# EAGLE board Syn-ShieldCarger-v02 (EAGLE 5.10)
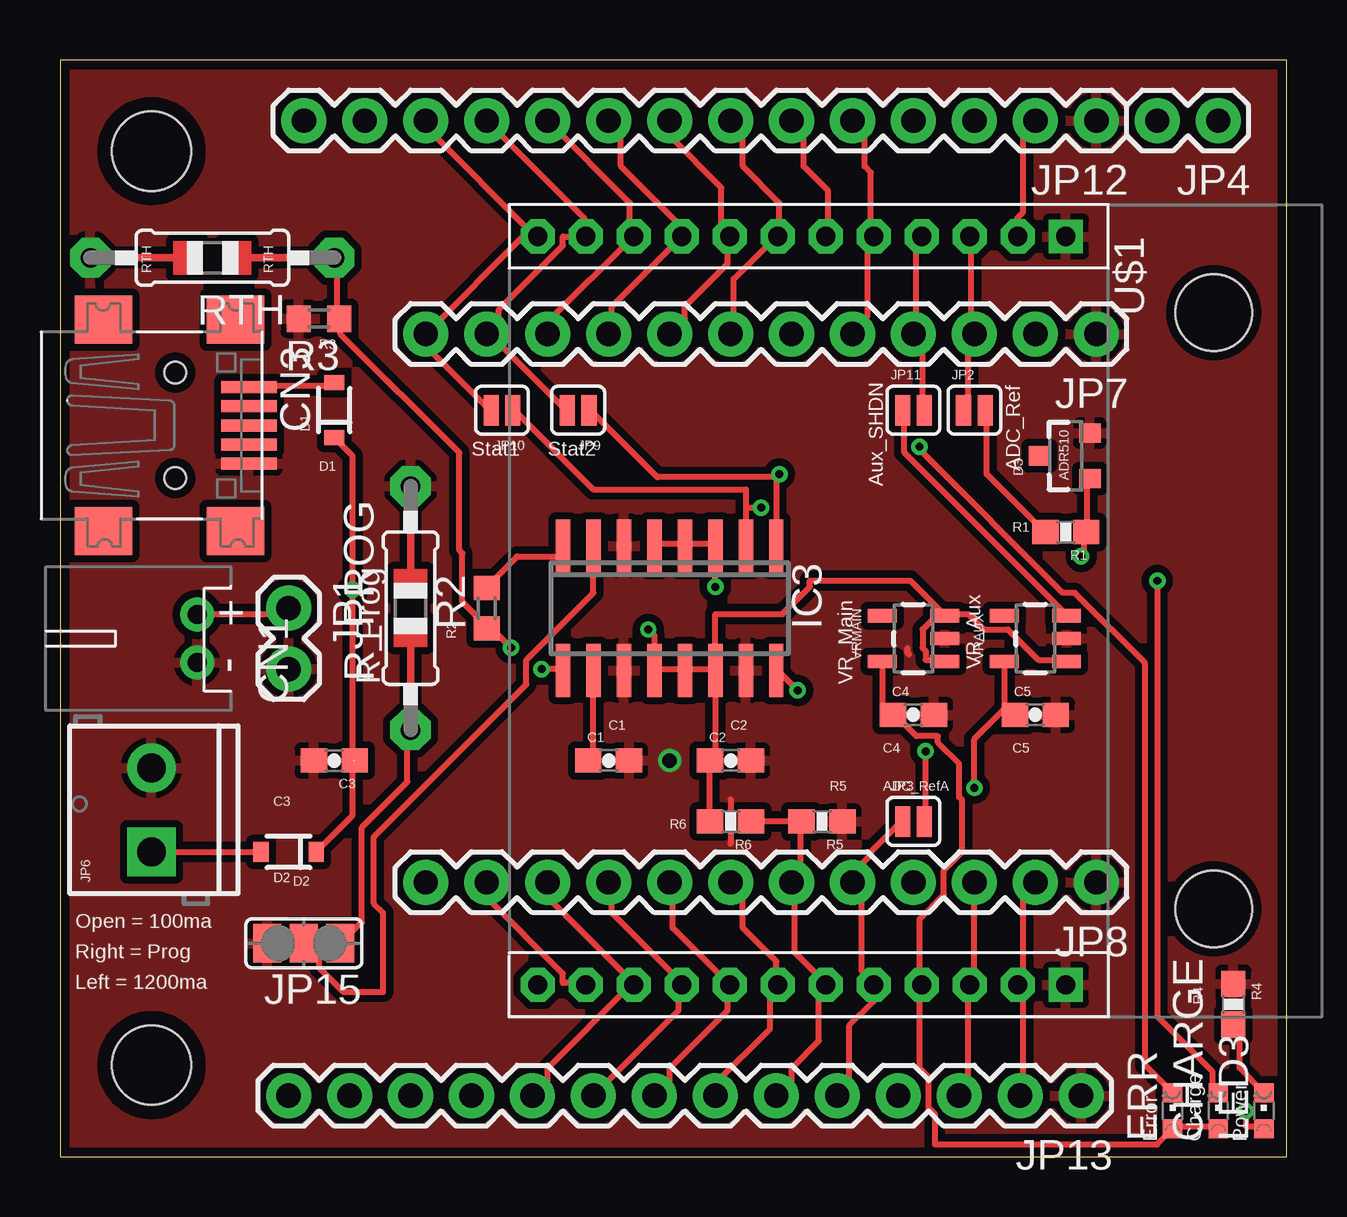
[diagram p0: board, top side]
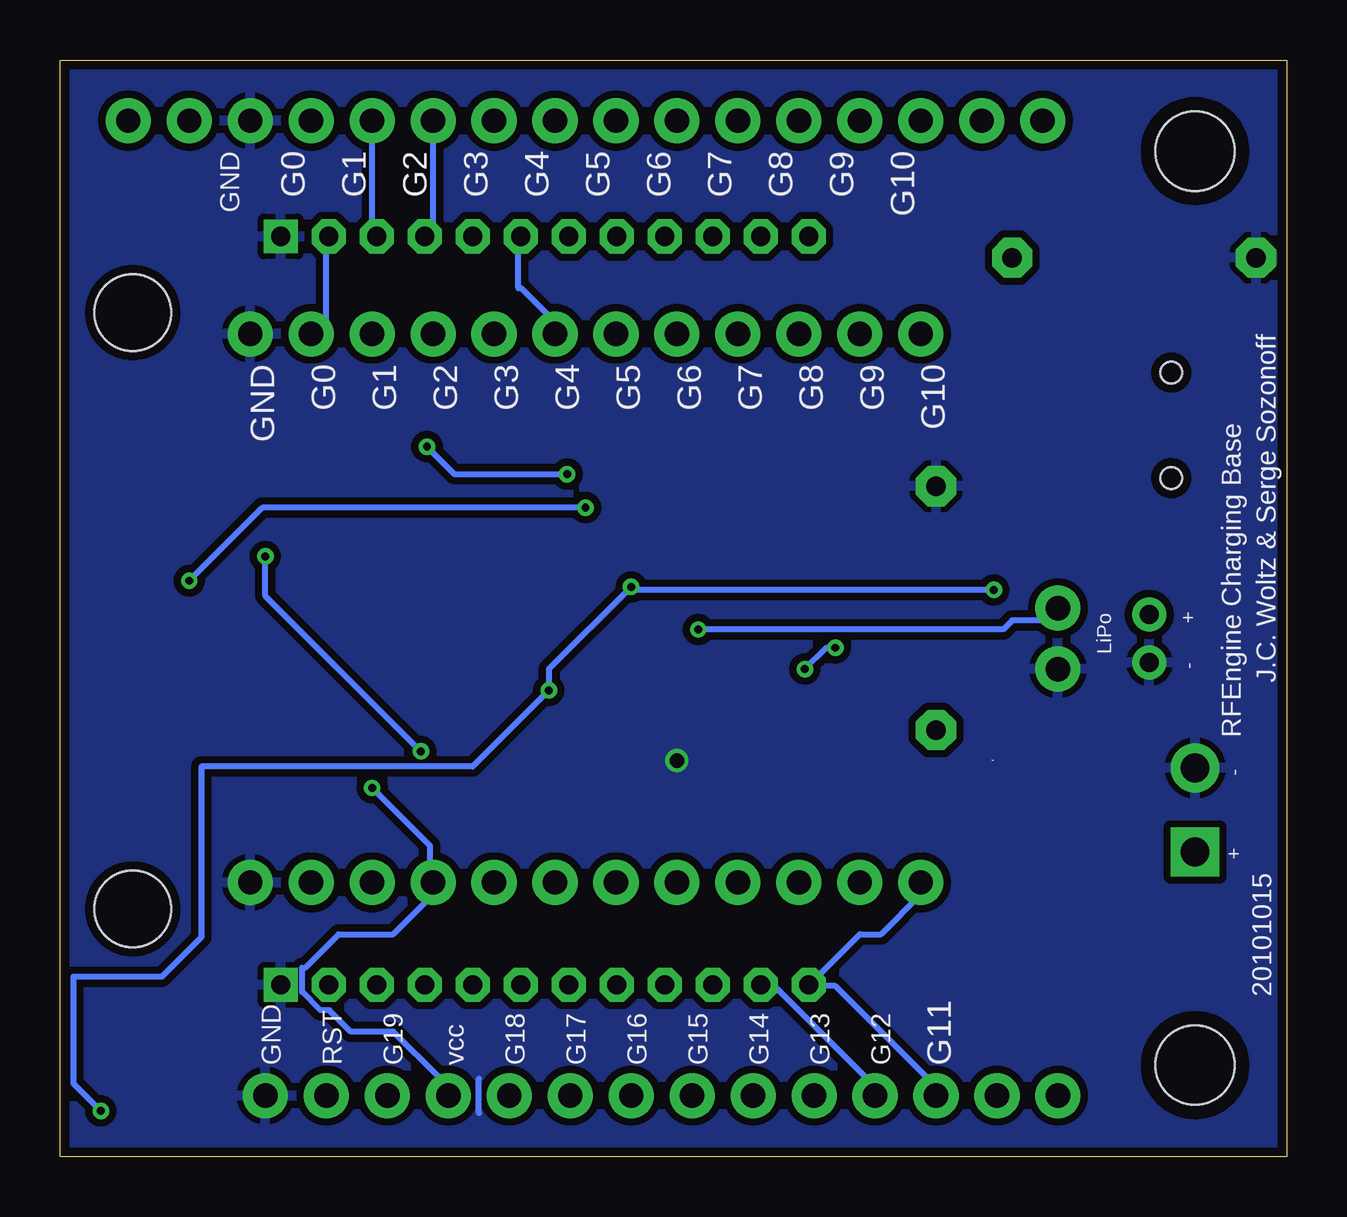
[diagram p1: board, bottom side, seen from below]

Size 51.1 x 45.71 mm. Coordinates in mm from the lower left corner, seen from the top.
Outline: 0,0 51.1,0 51.1,45.71 0,45.71 0,0
Copper layers (1*16): Top 0.0356mm / dielectric 1.5011mm / Bottom 0.0356mm
Design rules "LaenPCBOrder-JCModified": minimum track width 10mil, minimum drill 13mil, track to track 10mil, track to pad 6mil, pad to pad 6mil, via to via 6mil, smd to smd 6mil, copper to edge 15mil, drill to drill 6mil, minimum pad ring 12mil, minimum via ring 7mil, stop-mask expansion 4mil, vias tented up to drill 25mil, thermal gap 10mil

## Footprints (pad centres in the part's own frame; a part is rotated, then mirrored left to right if it is on the bottom)
0603-CAP = smd 1.1 x 1: 1 -0.85,0; 2 0.85,0
CHIPLED_0603 = smd 0.8 x 0.8: A 0,-0.75; C 0,0.75
JST-PH-2-THM-RA = drill 0.8 pad 1.422 round: 1 1,0; 2 -1,0
USB-MINIB = smd 0.5 x 2.308: D+ 0,4.064; D- -0.8,4.064; GND 1.6,4.064; ID 0.8,4.064; VBUS -1.6,4.064 | smd 2 x 2.4: GND1 -4.4,-2; GND2 -4.4,3.5; GND3 4.4,3.5; GND4 4.4,-2 | hole 0.9: -2.2,1; 2.2,1
SOD-323 = smd 0.63 x 0.83: 1 -1.15,0; 2 1.15,0
SOT23-3 = smd 0.8 x 0.9: 1 -0.95,-1; 2 0.95,-1; 3 0,1.1
SO16 = smd 0.6 x 2.2: 1 -4.445,-2.6; 2 -3.175,-2.6; 3 -1.905,-2.6; 4 -0.635,-2.6; 5 0.635,-2.6; 6 1.905,-2.6; 7 3.175,-2.6; 8 4.445,-2.6; 9 4.445,2.6; 10 3.175,2.6; 11 1.905,2.6; 12 0.635,2.6; 13 -0.635,2.6; 14 -1.905,2.6; 15 -3.175,2.6; 16 -4.445,2.6
1X02 = drill 1.016 pad 1.88 round: 1 0,0; 2 2.54,0
SJ_2S = smd 0.635 x 1.27: 1 -0.45,0; 2 0.45,0
STAND-OFF = hole 3.302: 0,0
SCREWTERMINAL-3.5MM-2 = drill 1.2 pad 2.032 square: 1 0,0 | drill 1.2 pad 2.032 round: 2 3.5,0
1X12 = drill 1.016 pad 1.88 round: 1 0,0; 2 2.54,0; 3 5.08,0; 4 7.62,0; 5 10.16,0; 6 12.7,0; 7 15.24,0; 8 17.78,0; 9 20.32,0; 10 22.86,0; 11 25.4,0; 12 27.94,0
1X14 = drill 1.016 pad 1.88 round: 1 0,0; 2 2.54,0; 3 5.08,0; 4 7.62,0; 5 10.16,0; 6 12.7,0; 7 15.24,0; 8 17.78,0; 9 20.32,0; 10 22.86,0; 11 25.4,0; 12 27.94,0; 13 30.48,0; 14 33.02,0
SJ_2 = smd 1.168 x 1.6: 1 -1.524,0; 2 0,0; 3 1.524,0
0603-RES = smd 1.1 x 1: 1 -0.85,0; 2 0.85,0
R0603 = smd 1 x 1.1: 1 -0.85,0; 2 0.85,0
0805-THM = drill 0.813 pad 1.676 octagon: 1 -5.08,0; 2 5.08,0
SYNAPSERFENGINE = drill 0.8 square: 1 0,0; 24 31.2,0 | drill 0.8 pad 1.422 octagon: 2 0,-2; 3 0,-4; 4 0,-6; 5 0,-8; 6 0,-10; 7 0,-12; 8 0,-14; 9 0,-16; 10 0,-18; 11 0,-20; 12 0,-22; 13 31.2,-22; 14 31.2,-20; 15 31.2,-18; 16 31.2,-16; 17 31.2,-14; 18 31.2,-12; 19 31.2,-10; 20 31.2,-8; 21 31.2,-6; 22 31.2,-4; 23 31.2,-2 | hole 3.2: 3.17,6.16; 28.03,6.16
SOT23-5 = smd 0.55 x 1.2: 1 -0.95,-1.3; 2 0,-1.3; 3 0.95,-1.3; 4 0.95,1.3; 5 -0.95,1.3

## Placement (x,y rotation side)
C1  0.47uF  [0603-CAP]  22.86,16.51 0 top
C2  10uF  [0603-CAP]  27.94,16.51 0 top
C3  10uF  [0603-CAP]  11.43,16.51 180 top
C4  1uF  [0603-CAP]  35.56,18.41 0 top
C5  1uF  [0603-CAP]  40.64,18.41 0 top
CHARGE  ORG  [CHIPLED_0603]  48.26,1.91 0 top
CN1  [JST-PH-2-THM-RA]  5.71,21.59 90 top
CN3  [USB-MINIB]  3.81,30.48 270 top
D1  [SOD-323]  11.43,31.11 90 top
D2  [SOD-323]  9.53,12.7 180 top
D3  ADR510  [SOT23-3]  41.91,29.21 90 top
ERR  RED  [CHIPLED_0603]  46.35,1.91 0 top
IC3  [SO16]  25.4,22.86 180 top
JP1  [1X02]  9.53,22.86 270 top
JP2  [SJ_2S]  38.1,31.11 0 top
JP3  [SJ_2S]  35.56,13.97 0 top
JP4  [1X02]  48.26,43.18 180 top
JP5  STAND-OFF  [STAND-OFF]  3.81,41.91 0 top
JP6  [SCREWTERMINAL-3.5MM-2]  3.81,12.7 90 top
JP7  M12PTH  [1X12]  43.18,34.29 180 top
JP8  M12PTH  [1X12]  43.18,11.43 180 top
JP9  [SJ_2S]  21.59,31.11 180 top
JP10  [SJ_2S]  18.41,31.11 180 top
JP11  [SJ_2S]  35.56,31.11 0 top
JP12  M14  [1X14]  43.18,43.18 180 top
JP13  M14  [1X14]  42.55,2.54 180 top
JP15  [SJ_2]  10.16,8.89 180 top
JP17  STAND-OFF  [STAND-OFF]  3.81,3.81 0 top
LED3  [CHIPLED_0603]  50.16,1.91 0 top
R1  10K  [0603-RES]  41.91,26.04 180 top
R2  6.19K  [R0603]  17.78,22.86 90 top
R3  7.3K  [R0603]  10.79,34.92 180 top
R4  1K  [0603-RES]  48.9,6.35 270 top
R5  1M  [0603-RES]  31.75,13.97 180 top
R6  1M  [0603-RES]  27.94,13.97 180 top
R_PROG  [0805-THM]  14.61,22.86 90 top
RTH  10K @ 25degC  [0805-THM]  6.35,37.47 180 top
U$1  SYNAPSEWIRELESS-RFENGINESTD  [SYNAPSERFENGINE]  41.91,38.35 270 top
VRAUX  MCP1802  [SOT23-5]  40.64,21.59 90 top
VRMAIN  MCP1802  [SOT23-5]  35.56,21.59 90 top

## Library data of the parts
C1-C5 D1 D2 JP1-JP13 JP15 JP17 R1 R4-R6 = SparkFun
CHARGE CN1 CN3 ERR IC3 LED3 R2 R3 R_PROG RTH = adafruit
D3 VRAUX VRMAIN = 0_jc-modified
U$1 = 0_jc-custom

## Nets
AUX_SHDN: JP11.1 VRAUX.3
GND: C1.2 C2.2 C3.2 C4.2 C5.2 CN1.2 CN3.GND D3.2 IC3.6 IC3.11 IC3.15 JP1.2 JP6.2 JP7.1 JP8.1 JP12.1 JP13.1 JP15.3 R3.2 R4.1 R5.1 R_PROG.2 RTH.2 U$1.1 U$1.24 VRAUX.2 VRMAIN.2
GP0: JP7.2 JP12.2 U$1.2
GP1: JP2.1 JP7.3 JP12.3 U$1.3
GP2: JP7.4 JP11.2 JP12.4 U$1.4
GP3: JP7.5 JP12.5 U$1.5
GP4: JP7.6 JP12.6 U$1.6
GP5: JP7.7 JP12.7 U$1.7
GP6: JP7.8 JP12.8 U$1.8
GP7: JP7.9 JP12.9 U$1.9
GP8: JP7.10 JP12.10 U$1.10
GP9: JP7.11 JP9.2 JP12.11 U$1.11
GP10: JP7.12 JP10.2 JP12.12 U$1.12
GP11: JP8.12 JP13.12 U$1.13
GP12: JP8.11 JP13.11 U$1.14
GP13: JP8.10 JP13.10 U$1.15
GP14: JP8.9 JP13.9 U$1.16
GP15: JP8.8 JP13.8 U$1.17
GP16: JP8.7 JP13.7 U$1.18
GP17: JP8.6 JP13.6 R5.2 R6.1 U$1.19
GP18: JP3.1 JP8.5 JP13.5 U$1.20
GP19: JP8.3 JP13.3 U$1.22
MPROG: IC3.7 JP15.2
N$1: JP4.2
N$2: LED3.C R4.2
N$3: D3.1 JP3.2 R1.1
N$4: JP2.2 R1.2
N$5: JP4.1
N$6: JP12.13
N$7: IC3.8 R2.2
N$8: IC3.9 R2.1 R3.1 RTH.1
N$9: C1.1 IC3.10
N$10: JP12.14
N$11: JP15.1 R_PROG.1
N$12: JP13.13
N$13: JP13.14
N$21: CN3.VBUS D1.2
RESET: JP8.2 JP13.2 U$1.23
STAT1: CHARGE.C IC3.2 JP10.1
STAT2: ERR.C IC3.1 JP9.1
VBAT+: C2.1 CN1.1 IC3.12 IC3.13 IC3.14 JP1.1 R6.2 VRAUX.1 VRMAIN.1 VRMAIN.3
VCC3: C4.1 CHARGE.A ERR.A U$1.21 VRMAIN.5
VCC3_AUX: C5.1 JP8.4 JP13.4 VRAUX.5
VIN: C3.1 D1.1 D2.1 IC3.3 IC3.4 IC3.5 IC3.16 LED3.A
VINJ: D2.2 JP6.1

## Tracks (layer width: path | path; a pad name or v marks a point on that pad's centre or on a via)
AUX_SHDN
  Top 0.254: VRAUX.3 41.91,22.61 35.18,29.34 35.18,31.11 JP11.1
GND  (via drill 0.6)
  Top 0.254: 35.31,21.19 35.31,21.08 35.37,20.93 | 27.94,14.89 27.94,13.05
  Bottom 0.254: 33.66,1.82 33.66,3.26
  other vias: 25.4,16.51
  pour Bottom (isolate 0.305): 0,45.72 50.8,45.72 50.8,0 0,0
  pour Top (isolate 0.305): 0,45.72 50.8,45.72 50.8,0 0,0
GP0
  Top 0.254: JP12.2 40.13,42.67 40.13,39.37 39.88,39.12 39.88,38.35 U$1.2
  Bottom 0.254: JP7.2 40.01,34.29 40.01,38.35 U$1.2
GP1
  Top 0.254: JP2.1 37.72,31.11 37.85,31.24 37.85,34.04 JP7.3 37.97,34.29 37.97,38.35 U$1.3
  Bottom 0.254: JP12.3 38.1,38.35 U$1.3
GP2
  Top 0.254: JP11.2 35.94,31.11 35.94,33.4 35.56,33.78 JP7.4 35.69,33.78 35.69,38.23 35.81,38.35 U$1.4
  Bottom 0.254: JP12.4 35.56,38.35 U$1.4
GP3
  Top 0.254: JP7.5 33.02,34.42 33.66,35.05 33.66,38.1 U$1.5 33.78,38.35 33.78,41.02 33.53,41.27 33.53,42.67 JP12.5
GP4
  Top 0.254: JP12.6 30.99,42.67 30.99,41.27 32,40.26 32,38.35 U$1.6
  Bottom 0.254: JP7.6 30.48,34.8 31.88,36.2 32,36.2 32,38.35 U$1.6
GP5
  Top 0.254: JP7.7 28.07,34.42 28.07,36.58 29.84,38.35 U$1.7 29.97,38.35 29.97,39.75 28.45,41.27 28.45,42.67 JP12.7
GP6
  Top 0.254: 27.81,38.35 27.56,38.61 27.56,40.39 25.4,42.55 JP12.8 | JP7.8 26.04,34.92 26.04,35.43 27.81,37.21 27.81,38.35 | 27.81,38.35 U$1.8
GP7
  Top 0.254: JP7.9 22.99,34.42 22.99,35.43 U$1.9 25.78,38.35 25.78,38.86 23.37,41.27 23.37,42.67 JP12.9
GP8
  Top 0.254: JP7.10 20.32,34.8 23.88,38.35 U$1.10 23.75,38.35 23.75,39.75 JP12.10
GP9
  Top 0.254: JP9.2 21.08,31.11 17.91,34.29 JP7.11 18.29,34.04 18.29,35.31 20.95,37.97 20.95,38.35 21.84,38.35 | JP12.11 21.84,39.12 21.84,38.35 | 21.84,38.35 U$1.11
GP10
  Top 0.254: JP10.2 17.91,31.11 15.24,33.78 JP7.12 19.43,38.48 19.43,38.61 U$1.12 19.81,38.35 15.24,42.93 JP12.12
GP11
  Bottom 0.254: JP8.12 15.24,10.92 16.89,9.27 17.78,9.27 19.81,7.24 U$1.13 19.81,7.11 18.8,7.11 14.99,3.3 14.61,3.3 JP13.12
GP12
  Top 0.254: JP8.11 17.78,10.79 20.95,7.62 20.95,7.24 21.84,7.24 U$1.14
  Bottom 0.254: JP13.11 17.14,3.3 17.53,3.3 21.34,7.11 21.84,7.11 U$1.14
GP13
  Top 0.254: JP8.10 20.32,10.79 23.88,7.24 U$1.15 23.75,7.24 23.75,7.11 20.32,3.68 20.32,3.17 JP13.10
GP14
  Top 0.254: JP8.9 22.99,11.3 22.99,10.16 25.91,7.24 U$1.16 25.78,7.24 25.78,6.1 JP13.9
GP15
  Top 0.254: JP8.8 25.53,11.3 25.53,9.53 27.81,7.24 U$1.17 27.81,7.11 27.81,6.1 25.4,3.68 25.4,3.17 JP13.8
GP16
  Top 0.254: JP13.7 27.3,3.05 29.59,5.33 29.59,6.86 29.84,7.11 U$1.18 29.84,7.24 29.84,8.13 28.45,9.53 28.45,10.92 JP8.7
GP17
  Top 0.254: 30.86,13.97 R6.1 | 30.86,13.97 30.86,12.32 30.48,11.94 JP8.6 30.61,11.94 30.61,8.51 31.88,7.24 U$1.19 31.62,7.37 31.62,4.83 30.48,3.68 30.48,3.17 JP13.6 | 30.86,13.97 R5.2
GP18
  Top 0.254: JP3.1 35.05,13.97 33.78,12.7 33.78,12.57 33.02,11.81 JP8.5 33.4,12.06 33.4,7.75 33.91,7.24 U$1.20 33.91,7.11 33.91,6.48 32.89,5.46 32.89,3.05 JP13.5
GP19
  Top 0.254: JP8.3 38.1,7.37 37.97,7.24 U$1.22 37.85,7.11 37.85,2.92 JP13.3
MPROG
  Top 0.254: JP15.2 10.79,8.26 10.79,7.87 11.81,6.86 13.46,6.86 13.46,10.16 13.08,10.54 13.08,13.34 19.43,19.68 19.43,20.7 22.23,23.5 IC3.7
N$2
  Top 0.254: LED3.C 49.15,3.68 49.15,4.95 48.9,5.21 R4.2
N$3  (via drill 0.33)
  Top 0.254: D3.1 42.8,28.19 42.8,26.04 R1.1 42.67,26.04 42.67,25.15 v42.55,25.02 | v36.07,16.89 36.07,13.97 JP3.2
  Bottom 0.254: v36.07,16.89 42.55,23.37 v42.55,25.02
N$4
  Top 0.254: R1.2 41.02,26.04 38.61,28.45 38.61,31.11 JP2.2
N$7
  Top 0.254: R2.2 17.78,23.75 19.05,25.02 20.95,25.02 IC3.8
N$8  (via drill 0.33)
  Top 0.254: v20.07,20.32 20.95,20.32 IC3.9 | v18.8,21.21 17.78,22.23 R2.1 17.78,22.1 16.76,23.11 16.76,25.15 16.64,25.27 16.64,29.34 11.68,34.29 11.68,34.92 R3.1 11.56,34.92 11.56,37.34 RTH.1
  Bottom 0.254: v20.07,20.32 19.18,21.21 v18.8,21.21
N$9
  Top 0.254: C1.1 22.1,16.51 22.23,16.64 IC3.10
N$11
  Top 0.254: JP15.1 12.57,9.78 12.57,13.72 14.48,15.62 14.48,17.65 R_PROG.1
N$21
  Top 0.254: D1.2 11.43,32.13 7.87,32.13 CN3.VBUS
RESET
  Top 0.254: JP13.2 40.13,2.67 40.13,6.99 40.01,7.11 U$1.23 40.13,7.11 40.13,10.92 JP8.2
STAT1  (via drill 0.33)
  Top 0.254: JP10.1 18.92,31.11 22.23,27.81 28.57,27.81 28.57,27.05 | 28.57,27.05 IC3.2 | v45.72,24 45.72,5.84 48.01,3.56 48.01,2.92 CHARGE.C | 28.57,27.05 v29.21,27.05
  Bottom 0.254: v45.72,24 42.67,27.05 v29.21,27.05
STAT2  (via drill 0.33)
  Top 0.254: 29.84,28.32 24.89,28.32 22.1,31.11 JP9.1 | 29.84,28.32 IC3.1 | v35.81,29.59 35.81,29.46 41.78,23.5 42.29,23.5 45.21,20.57 45.21,3.81 ERR.C | v29.97,28.45 29.84,28.32
  Bottom 0.254: v35.81,29.59 34.67,28.45 v29.97,28.45
VBAT+  (via drill 0.33)
  Top 0.254: JP1.1 9.53,22.61 5.71,22.61 CN1.1 | VRMAIN.1 36.83,20.7 36.07,20.7 36.07,21.08 35.94,21.21 35.94,21.97 36.45,22.48 36.83,22.48 VRMAIN.3 | VRAUX.1 41.91,20.7 40.77,20.7 39.5,21.97 38.48,21.97 37.85,22.61 36.96,22.61 VRMAIN.3 | 24.77,20.32 26.04,20.32 | R6.2 27.05,13.97 27.05,16.51 C2.1 27.18,16.51 27.3,16.64 IC3.14 27.3,20.32 | 26.04,20.32 27.3,20.32 | 26.04,20.32 IC3.13 | 27.3,20.32 27.3,22.61 30.1,22.61 31.24,23.75 31.24,24 35.43,24 36.83,22.61 VRMAIN.3 | v24.51,21.97 24.77,21.72 24.77,20.32 | 24.77,20.32 IC3.12
  Bottom 0.254: JP1.1 10.03,22.35 11.43,22.35 11.81,21.97 v24.51,21.97
VCC3
  Top 0.254: VRMAIN.5 34.29,20.57 34.29,18.8 34.67,18.41 C4.1 34.8,18.41 35.69,17.53 36.58,17.53 36.58,17.27 37.47,16.38 37.47,14.99 37.59,14.86 37.59,12.7 36.83,11.94 36.83,10.92 35.81,9.91 35.81,7.24 U$1.21 35.81,7.11 35.81,3.68 36.2,3.3 36.2,2.03 36.45,1.78 36.45,0.51 45.72,0.51 46.35,1.14 ERR.A 46.35,1.27 48.26,1.27 CHARGE.A
VCC3_AUX  (via drill 0.33)
  Top 0.254: VRAUX.5 39.37,20.57 39.37,18.8 39.75,18.41 C5.1 39.37,18.67 38.1,17.4 v38.1,15.37
  Bottom 0.254: v38.1,15.37 35.69,12.95 35.69,11.43 | JP13.4 34.92,3.3 35.31,3.3 37.21,5.21 38.99,5.21 39.88,6.1 40.26,6.1 41.02,6.86 41.02,7.87 40.89,7.87 39.5,9.27 37.21,9.27 35.69,10.79 35.69,11.43 | 35.69,11.43 JP8.4
VIN  (via drill 0.33)  (1 unrouted)
  Top 0.254: D2.1 10.67,12.7 12.19,14.22 12.19,16.51 v12.19,23.62 12.19,29.21 11.43,29.97 D1.1 | 26.04,25.53 24.77,25.53 IC3.5 | 26.04,25.53 27.3,25.53 IC3.3 v27.3,23.75 | 26.04,25.53 IC3.4 | v49.4,1.91 49.4,1.27 50.16,1.27 LED3.A | v30.73,19.43 29.84,20.32 IC3.16
  Bottom 0.254: v49.4,1.91 50.55,3.05 50.55,7.49 46.86,7.49 45.21,9.14 45.21,16.26 33.91,16.26 v30.73,19.43 30.73,20.32 v27.3,23.75 27.3,23.62 v12.19,23.62
VINJ
  Top 0.254: JP6.1 D2.2

## Text on the board
tPlace: RTH | RTH | R3 | D1 | Stat1 | Stat2 | ADC_Ref | Aux_SHDN | ADR510 | R1 | R2 | R_Prog | VR_Main | VR_Aux | C1 | C2 | C4 | C5 | C3 | R5 | ADC_RefA | R6 | D2 | Open = 100ma | Right = Prog | Left = 1200ma | R4 | Error | Charge | Power
bPlace: G10 | G9 | G8 | G7 | G6 | G5 | G4 | G3 | G2 | G1 | G0 | GND | J.C. Woltz & Serge Sozonoff | G10 | G9 | G8 | G7 | G6 | G5 | G4 | G3 | G2 | G1 | G0 | GND | + | LiPo | - | RFEngine Charging Base | - | + | 20101015 | G11 | G12 | G13 | G14 | G15 | G16 | G17 | G18 | vcc | G19 | RST | GND